# EAGLE board ArdShld_sch v5 (EAGLE 9.7.0)
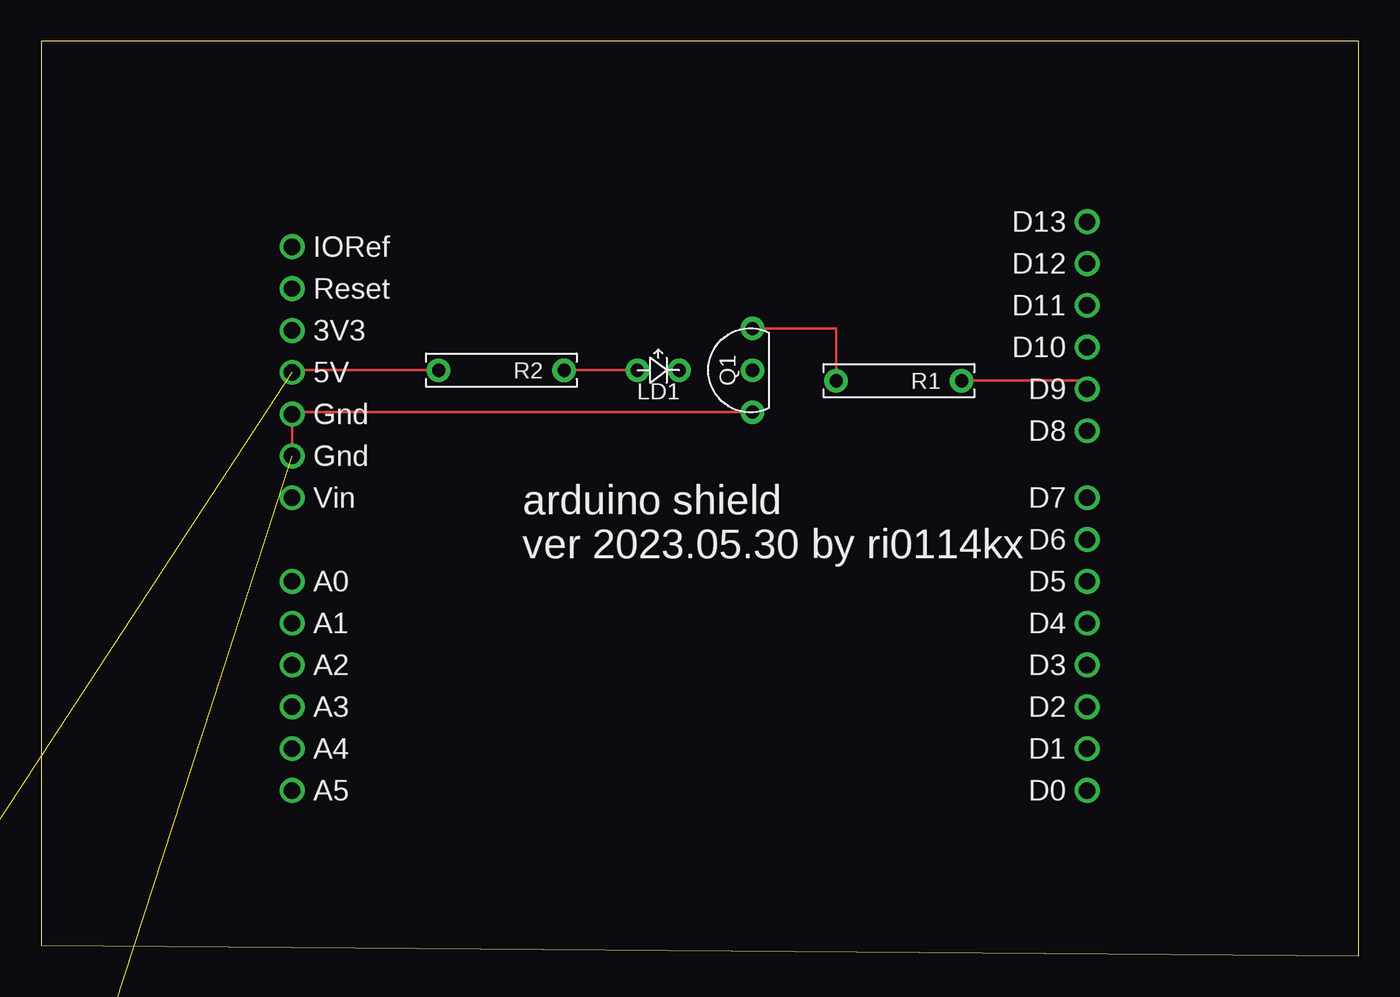
[diagram p0: board, top side]
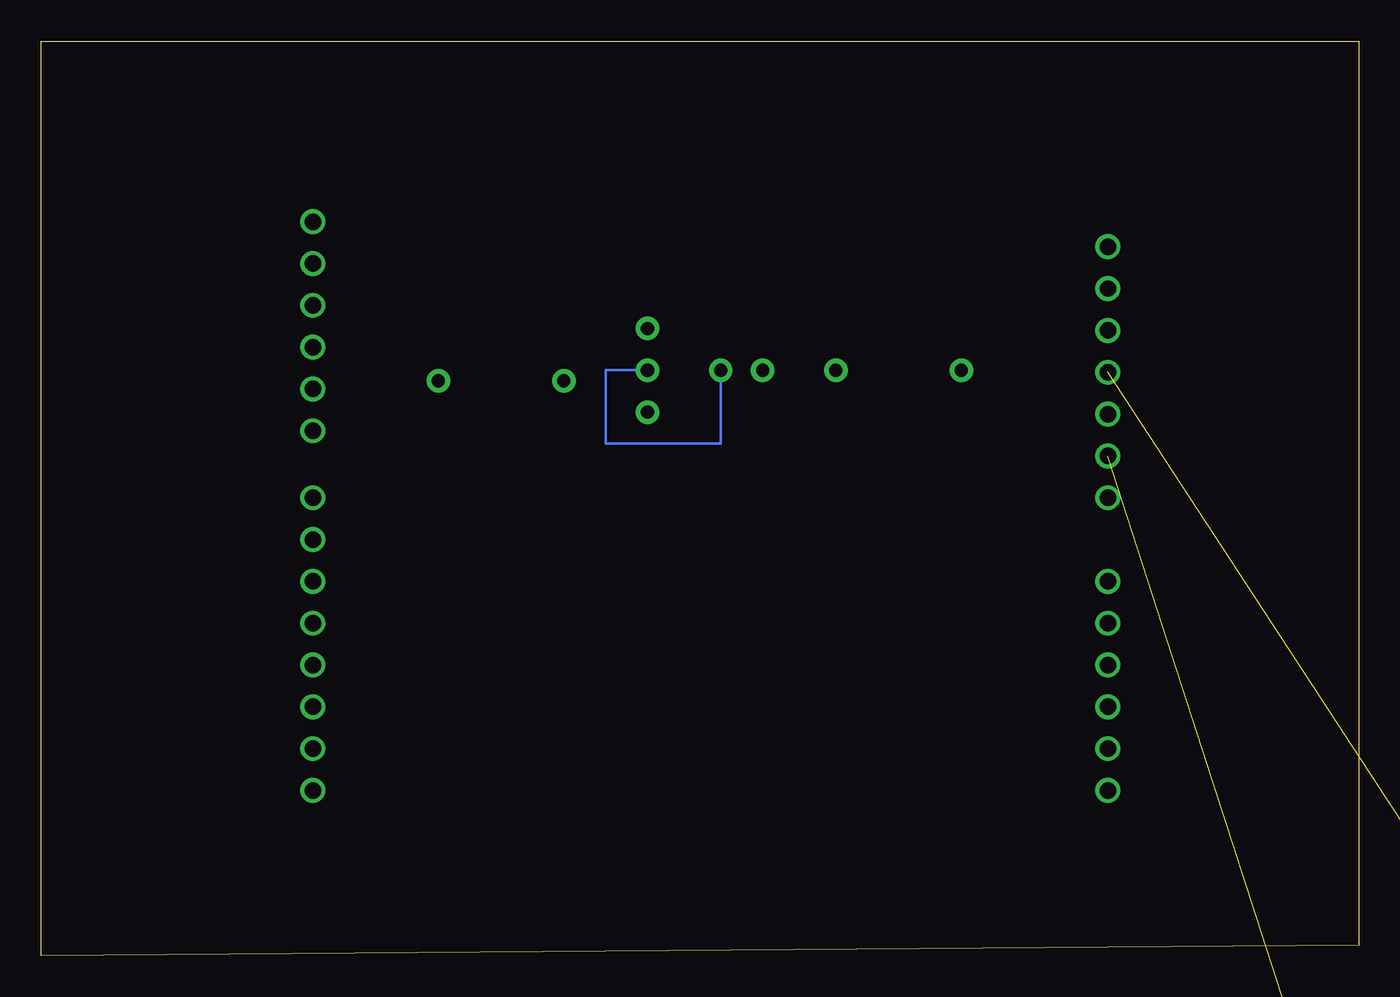
[diagram p1: board, bottom side, seen from below]

Size 79.99 x 55.55 mm. Coordinates in mm from the lower left corner, seen from the top.
Outline: 0,0.63 79.99,0 79.99,55.55 0,55.55 0,0.63
Copper layers (1*16): Top / Bottom
Stack-up Default Layer Stack: Top User Defined 0.035mm / Dielectric-1 User Defined 1.5mm / Bottom User Defined 0.035mm
Design rules "default": minimum track width 6mil, minimum drill 0.35mm, track to track 6mil, track to pad 6mil, pad to pad 6mil, via to via 6mil, smd to smd 6mil, copper to edge 40mil, drill to drill 6mil, minimum pad ring 10mil, minimum via ring 8mil, stop-mask expansion 4mil, vias tented up to drill 0mil, thermal gap 10mil

## Footprints (pad centres in the part's own frame; a part is rotated, then mirrored left to right if it is on the bottom)
LED100MIL = drill 0.8 pad 1.422: A -1.27,0; K 1.27,0
TR300MIL = drill 0.8 pad 1.422: P$1 -2.54,0; P$2 0,0; P$3 2.54,0
R300MIL = drill 0.8 pad 1.422: P$1 -3.81,0; P$2 3.81,0
TRIM-R = drill 1: P0 -2.54,0; P1 2.54,0; P2 0,2.54
PUSHSW = drill 1: P$1 -2.54,2.54; P$2 0,2.54; P$3 2.54,2.54; P$4 0,0; P$5 -2.54,-2.54; P$6 0,-2.54; P$7 2.54,-2.54
SLIDESW = drill 1: P$1 0,2.54; P$2 0,0; P$3 0,-2.54
ARDSHLD = drill 1: 3V3 2.54,30.48; 5V 2.54,27.94; A0 2.54,15.24; A1 2.54,12.7; A2 2.54,10.16; A3 2.54,7.62; A4 2.54,5.08; A5 2.54,2.54; D0 50.8,2.54; D1 50.8,5.08; D2 50.8,7.62; D3 50.8,10.16; D4 50.8,12.7; D5 50.8,15.24; D6 50.8,17.78; D7 50.8,20.32; D8 50.8,24.384; D9 50.8,26.924; D10 50.8,29.464; D11 50.8,32.004; D12 50.8,34.544; D13 50.8,37.084; GND@1 2.54,22.86; GND@2 2.54,25.4; IOREF 2.54,35.56; RESET 2.54,33.02; VIN 2.54,20.32

## Placement (x,y rotation side)
LD1  LED  [LED100MIL]  37.47,35.56 0 top
Q1  TR-NPN  [TR300MIL]  43.18,35.56 90 top
R1  1k  [R300MIL]  52.07,34.92 180 top
R2  1k  [R300MIL]  27.94,35.56 180 top
R3  1k  [R300MIL]  -78.1,-99.06 0 top  (outside the outline)
R4  10k  [R300MIL]  -78.1,-101.6 0 top  (outside the outline)
R5  1k  [R300MIL]  -78.1,-104.14 0 top  (outside the outline)
R6  10k  [R300MIL]  -78.1,-106.68 0 top  (outside the outline)
R7  1k  [R300MIL]  -78.1,-109.22 0 top  (outside the outline)
R8  10k  [TRIM-R]  -24.76,-101.6 0 top  (outside the outline)
R9  1k  [R300MIL]  -78.1,-114.3 0 top  (outside the outline)
SW1  PUSHSW  [PUSHSW]  -88.27,-110.49 0 top  (outside the outline)
SW3  SLIDESW  [SLIDESW]  -104.77,-109.22 0 top  (outside the outline)
U$1  ARDSHLD  [ARDSHLD]  12.7,7.5 0 top

## Library data of the parts
LD1 Q1 R1-R9 SW1 SW3 U$1 = 1rizmlib

## Nets
+5V: R2.P$2 R4.P$2 R6.P$2 R9.P$2 U$1.5V
A0: R7.P$1
D2: R5.P$1
D4: R3.P$1
D9: R1.P$1 U$1.D9
GND: Q1.P$1 R8.P0 SW1.P$5 SW1.P$6 SW1.P$7 SW3.P$3 U$1.GND@1 U$1.GND@2
N$1: LD1.K Q1.P$2
N$2: LD1.A R2.P$1
N$3: Q1.P$3 R1.P$2
N$4: R5.P$2 R6.P$1 SW1.P$1 SW1.P$2 SW1.P$3 SW1.P$4
N$5: R4.P$1 SW3.P$1
N$6: R8.P1 R9.P$1
N$7: R3.P$2 SW3.P$2
N$11: R7.P$2 R8.P2

## Tracks (layer width: path | path; a pad name or v marks a point on that pad's centre or on a via)
+5V  (3 unrouted)
  Top 0.152: U$1.5V 15.36,35.56 R2.P$2
D9
  Top 0.152: R1.P$1 63,34.92 U$1.D9
GND  (5 unrouted)
  Top 0.152: U$1.GND@1 U$1.GND@2 15.36,33.02 Q1.P$1
N$1
  Bottom 0.152: LD1.K 38.73,31.11 45.72,31.11 45.72,35.56 Q1.P$2
N$2
  Top 0.152: R2.P$1 LD1.A
N$3
  Top 0.152: Q1.P$3 48.26,38.1 R1.P$2
N$4  (5 unrouted)
N$5  (1 unrouted)
N$6  (1 unrouted)
N$7  (1 unrouted)
N$11  (1 unrouted)

## Text on the board
tPlace: arduino shield / ver 2023.05.30 by ri0114kx